# Altium PCB CC_SoC Debugger Ver1.02_DXF.PcbDoc
Units mil, origin at the board's own origin, x right, y up, seen from the top; angles counter-clockwise.
Board outline 3750.19 x 1742.31 mil, 3 copper layers (TopLayer, MidLayer24, BottomLayer); 7 components, 43 nets, 24 pads, 0 vias.
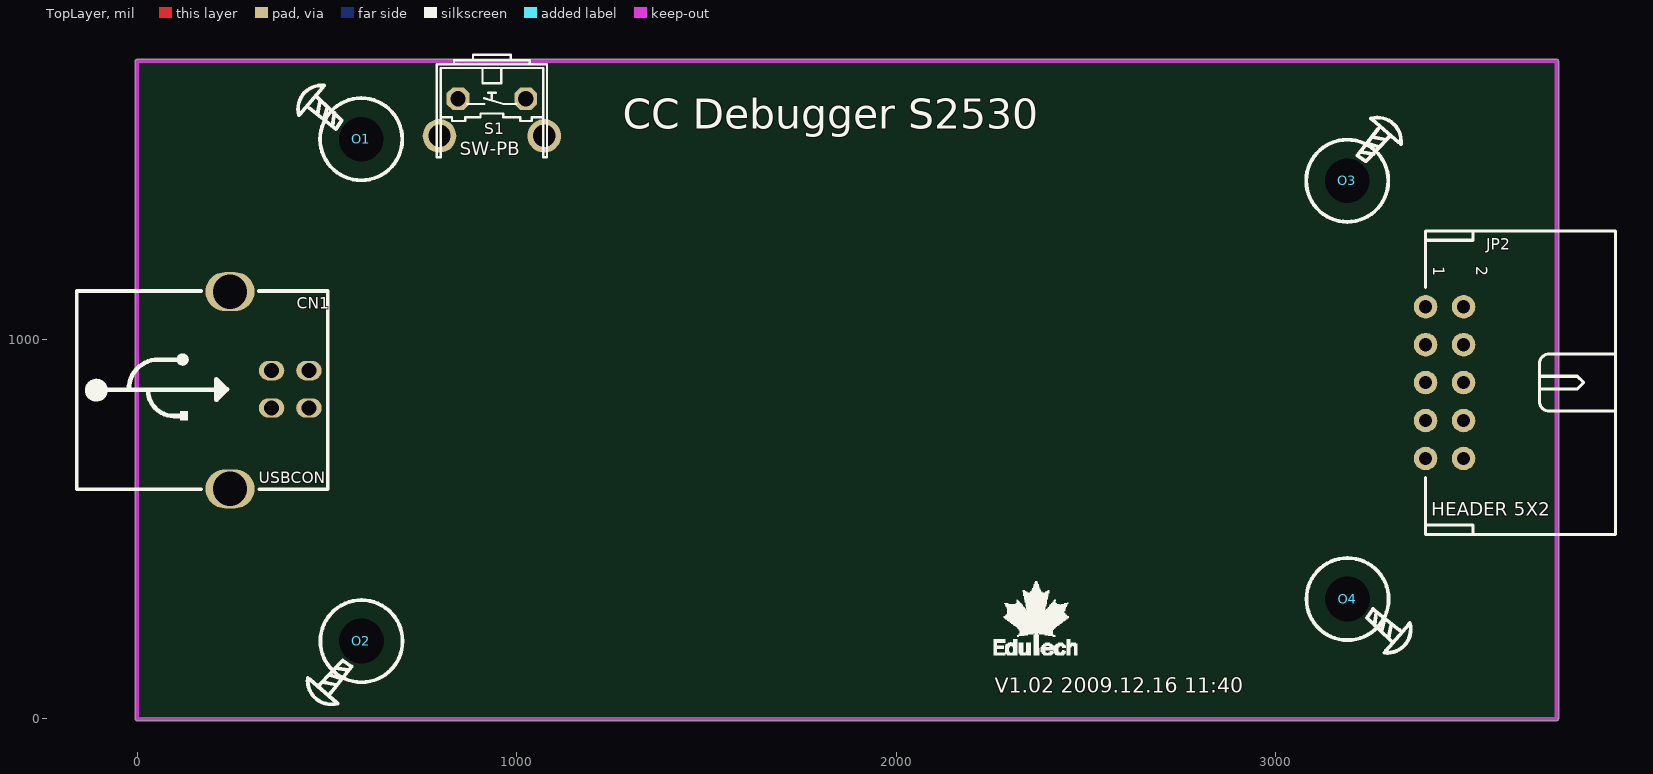
[diagram p0: TopLayer view]
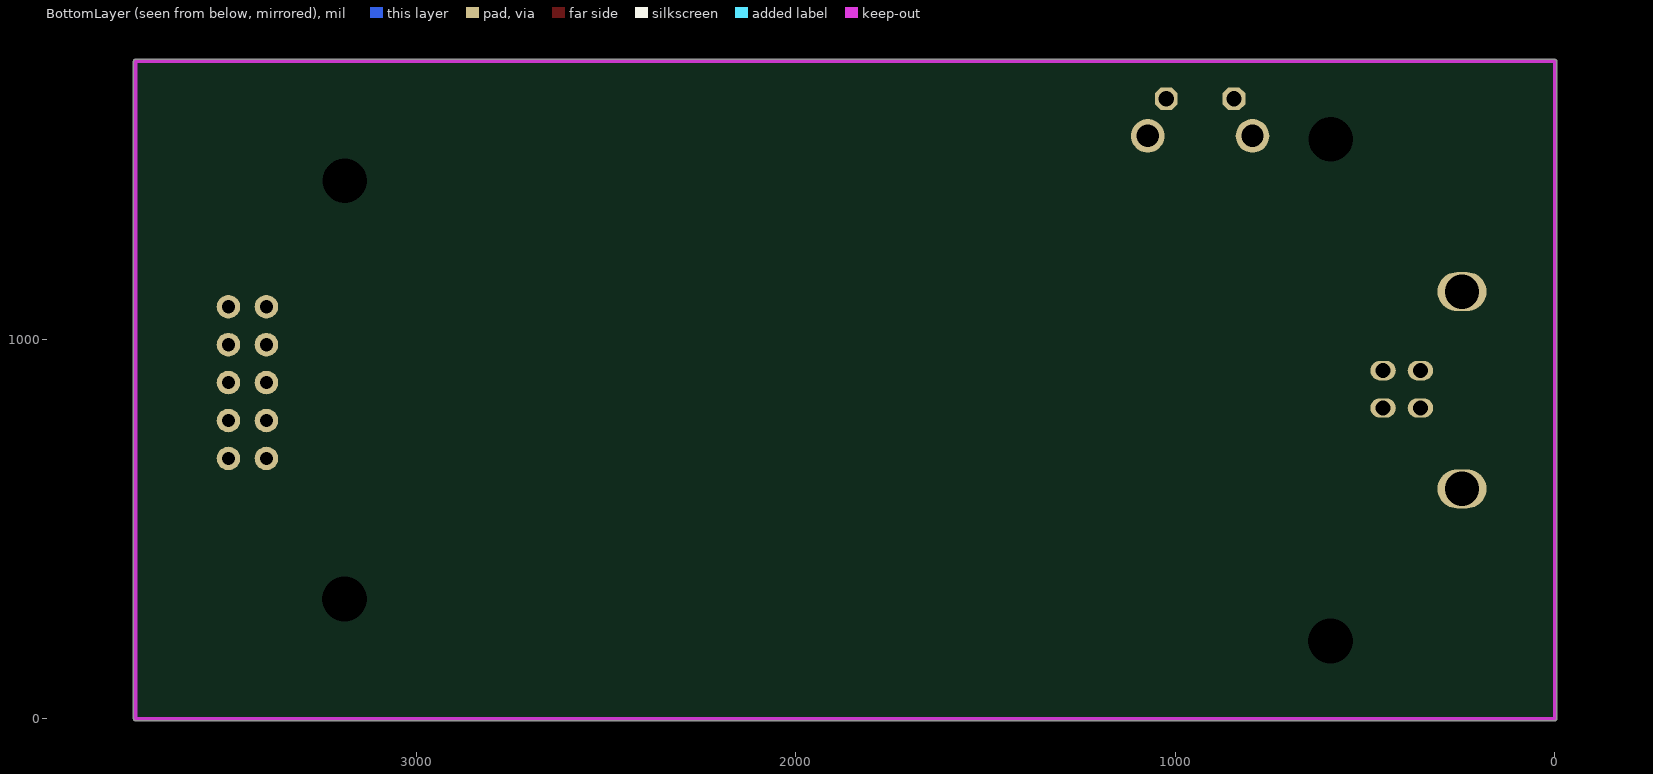
[diagram p1: BottomLayer view, seen from below]

## Layer stack, top to bottom
TopLayer: signal copper 1.4
Dielectric: core 12.6, FR-4, Dk 4.8
MidLayer24: signal copper 1.4
Dielectric: dielectric 12.6, FR-4, Dk 4.8
BottomLayer: signal copper 1.4

## Board outline
0,-5.02 cw(c0,0) -5.01,0 -5.01,1732.28 cw(c0,1732.28) 0,1737.3 3740.16,1737.3 cw(c3740.16,1732.28) 3745.17,1732.28 3745.17,0 cw(c3740.16,0) 3740.16,-5.02

## Design rules (kind name [scope] priority, off if disabled: settings)
Clearance Clearance_BottomLayerGnd [InNamedPolygon('BottomLayer-GND')] p1: gap=20
Clearance Clearance_TopLayerGnd [InNamedPolygon('TopLayer-GND')] p2: gap=20
Clearance CC2511 [(InComponent('U2'))] p3: gap=6
Clearance [All] p4: gap=8
ComponentClearance [All] p1 off: gap=10 collisioncheckmode=3 verticalgap=10 showdistances=FALSE
FabricationTestPointUsage TestPointUsage [All] p1: valid=0 allowmultiple=FALSE
FabricationTestpoint Testpoint [All] p1: side=3 testpointundercomponent=TRUE minsize=40 maxsize=100 preferedsize=60 minholesize=20 maxholesize=40 preferedholesize=32 testpointgrid=1 allowsidetop=TRUE allowsidebottom=TRUE usegrid=TRUE gridtolerance=0.01
HoleSize [All] p1: absolutevalues=TRUE maxlimit=196.85 minlimit=0 maxpercent=80.000 minpercent=20.000
MatchedLengths USBD [InNetClass('All Nets') vs InNetClass('All Nets')] p1: tolerance=11.81 checknetsindiffpair=TRUE checkdiffpairvsdiffpair=TRUE checkothers=TRUE
MatchedLengths USB [InNetClass('USB') vs InNetClass('All Nets')] p2: tolerance=11.81 checknetsindiffpair=TRUE checkdiffpairvsdiffpair=TRUE checkothers=TRUE
PlaneConnect [HasPad('U2-37')] p1: planeconnectstyle=Direct reliefexpansion=20 reliefentries=4 reliefconductorwidth=10 reliefairgap=10
PolygonConnect [IsVia] p1: connectstyle=Direct reliefconductorwidth=13.78 reliefentries=4 polygonreliefangle="90 Angle"
RoutingLayers [All] p1: top layer_v5=TRUE mid layer 24_v5=FALSE bottom layer_v5=TRUE
RoutingVias [All] p1: holewidth=32 width=13.5 viastyle="Through Hole" minholewidth=32 minwidth=13.5 maxholewidth=32 maxwidth=13.5
SilkscreenOverComponentPads [IsPad] p1: minsilkscreentomaskgap=10
SolderMaskExpansion [All] p1: expansion=4
Width Width_VBUS [InNet('VBUS')] p1: maxlimit=47.24 minlimit=7.87 preferedwidth=39.37
Width Width_3.3V [InNet('+3.3V')] p2: maxlimit=47.24 minlimit=7.87 preferedwidth=15
Width Width_All [All] p3: maxlimit=39.37 minlimit=7.87 preferedwidth=10
21 further rules are at their usual default settings.

## Components (designator, comment, footprint, x,y, rotation, side; value= is the part's Value field where it differs from the comment)
CN1 "USBCON" USB-B 452.76,818.9 r270 top locked
JP2 "HEADER 5X2" FKV10LN 3444.88,885.83 r270 top locked
O1 "" HOLE3_1 590.55,1527.56 r0 top locked
O2 "" HOLE3_1 590.55,204.72 r90 top locked
O3 "" HOLE3_1 3188.98,1417.32 r270 top locked
O4 "" HOLE3_1 3188.98,314.96 r180 top locked
S1 "SW-PB" B3F-31XX 1023.62,1633.86 r180 top

## Footprints (in the part's own frame and the unit in brackets; to place one, negate y for a bottom-side part, rotate by r counter-clockwise, add the part's x,y. Pads: shape width x height; smd on the part's side, far side on the other; paste and mask are expansions set on the pad)
B3F-31XX [mil]
  oct 60x60 hole 40: 1(0,0) 2(178,0)
  round 88.5 hole 59: 3(-49,98) 4(227,98)
  silkscreen extent -56,-116 234,154
FKV10LN [mil]
  round 62 hole 35: 1(-200,-50) 2(-200,50) 3(-100,-50) 4(-100,50) 5(0,-50) 6(0,50) 7(100,-50) 8(100,50) 9(200,-50) 10(200,50)
  silkscreen extent -400,-50 400,450
HOLE3_1 [mm]
  round 1 hole 3 unplated: 0(-0.007,-0.011)
  silkscreen extent -4.23,-2.76 2.74,3.59
USB-B [mm]
  oval 1.3x1.7 hole 1.016: D+(-2.5,-2.506) D-(-2.5,-0.006) VBUS(0,-0.006) VSS(0,-2.506)
  oval 2.6x3.3 hole 2.3: SH1(-7.789,-5.287) SH2(5.411,-5.287)
  silkscreen extent -7.82,-15.55 5.44,1.25

## Nets (pads, with @x,y where several pads share a name; then routed paths per layer and width w, separated by ;. In a path a pad name is that pad's centre, name@x,y a point inside that pad or via, vN(x,y) a via of type N, cw(c..) or ccw(c..) an arc to the next point about the centre after c; other vN are vias at no path point)
+3.3V: 
D+: 
D-: 
D\B\G\_R\E\S\E\T\: 
DBG_DC: 
DBG_DC_DIR: 
DBG_DD: 
DBG_DD_DIR: 
DBG_RESET: 
DUT_CSN: JP2.5
DUT_DC: JP2.3
DUT_DD: JP2.4
DUT_MISO/RX: JP2.10
DUT_MOSI/TX: JP2.8
DUT_RESET: JP2.7
DUT_SCLK: JP2.6
DUT_VCC: JP2.2
GND: CN1.SH1 CN1.SH2 CN1.VSS JP2.1 S1.2
LED_GREEN: 
LED_RED: 
NetC1_1: 
NetC3_1: 
NetC4_1: 
NetCN1_D+: CN1.D+
NetCN1_D-: CN1.D-
NetJP1_3: 
NetJP1_4: 
NetJP2_9: JP2.9
NetLED1_1: 
NetLED1_3: 
NetQ1_1: 
NetR8_2: 
RESET_N: S1.1
SPI_CSN: 
SPI_EN: 
SPI_MISO: 
SPI_MOSI: 
SPI_SCLK: 
UART_EN: 
UART_RX: 
UART_TX: 
USB_IFC_CTRL: 
VBUS: CN1.VBUS
pads on no net: O1.0 O2.0 O3.0 O4.0 S1.3 S1.4

## Keep-outs
KeepOutLayer:
  lines w10: 0,0 0,1732.28 3740.16,1732.28 3740.16,0 0,0

## Silkscreen, mask and mechanical layers (free items; w line width, h text height)
TopOverlay:
  drawing of 309 lines, arcs and shapes, not listed
  text "CC Debugger S2530" at 1280,1555 h78.74
  text "V1.02 2009.12.16 11:40" at 2260,69 h39.37

## Text inside footprints (layer, text, board x,y; h text height)
JP2: TopOverlay "1" at 3414.88,1191.83 h30 r270; TopOverlay "2" at 3527.88,1192.83 h30 r270